# Altium PCB PCB 0901.PcbDoc (part 3 of 3)
Units mm, origin at the board's own origin, x right, y up, seen from the top; angles counter-clockwise.
Board outline 234.06 x 185.93 mm, 2 copper layers (Top Layer, Bottom Layer); 162 components, 256 nets, 1015 pads, 205 vias.
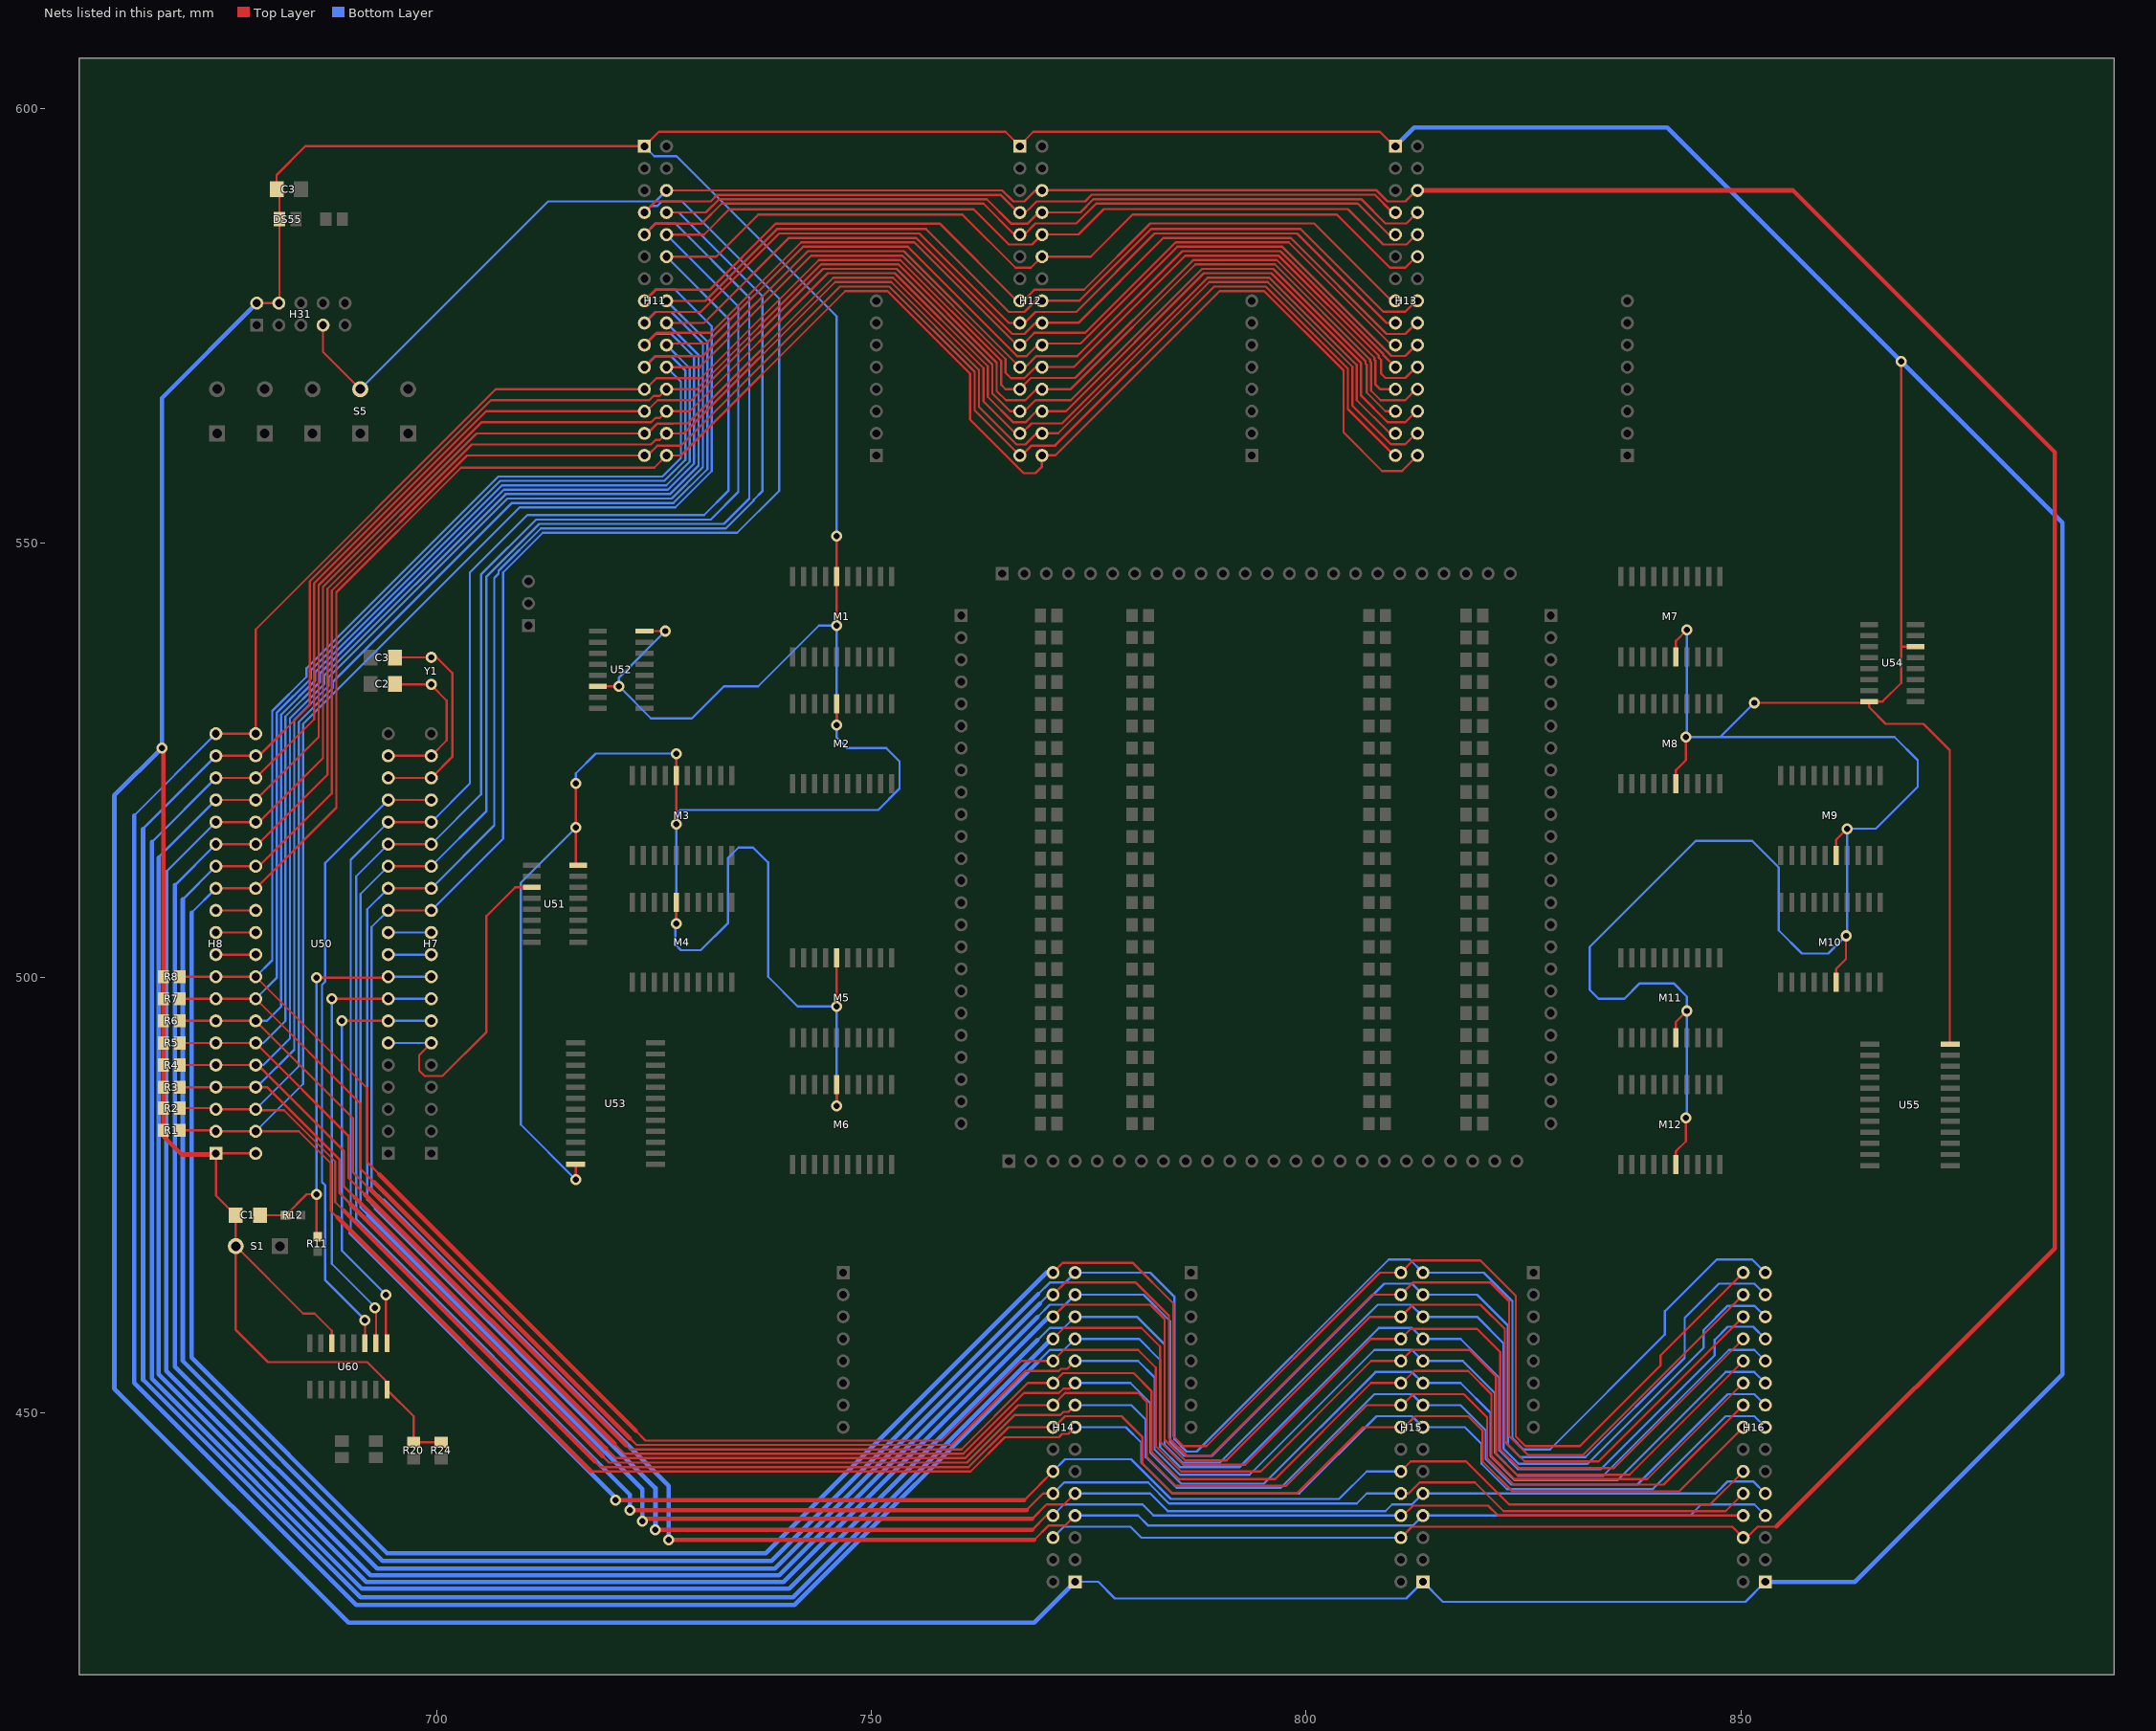
[diagram p3: the nets of this part, all layers, seen from the top]

## Via types
v1: diameter 1.27, hole 0.711, Top Layer to Bottom Layer, 205 vias

## Nets (pads, with @x,y where several pads share a name; then routed paths per layer and width w, separated by ;. In a path a pad name is that pad's centre, name@x,y a point inside that pad or via, vN(x,y) a via of type N, cw(c..) or ccw(c..) an arc to the next point about the centre after c; other vN are vias at no path point) (continued)
P6: H7.6 U50.6 U51.3 | length 38.7
  Top Layer w0.254: H7.6@699.389,492.506 697.992,491.109 697.992,489.331 698.627,488.696 700.659,488.696 705.739,493.776 705.739,507.111 709.041,510.413 U51.3@710.938,510.413
  Bottom Layer w0.254: U50.6@694.436,492.506 H7.6@699.389,492.506
P7: H7.7 U50.7 U60.1 | length 49.5
  Top Layer w0.254: v1(689.102,495.046) U50.7@694.436,495.046 ; v1(694.182,463.55) 694.182,458.097 U60.1@694.309,457.97
  Bottom Layer w0.254: v1(689.102,495.046) 689.102,468.63 v1(694.182,463.55) ; U50.7@694.436,495.046 H7.7@699.389,495.046
P8: H7.8 U50.8 U60.2 | length 53.2
  Top Layer w0.254: v1(687.959,497.586) U50.8@694.436,497.586 ; v1(692.912,462.026) 693.039,461.899 U60.2@693.039,457.97
  Bottom Layer w0.254: v1(687.959,497.586) 687.959,467.106 692.912,462.153 v1(692.912,462.026) ; U50.8@694.436,497.586 H7.8@699.389,497.586
P9: C1.2 H7.9 R11.2 R12.2 U50.9 | length 50.4
  Top Layer w0.254: C1.2@679.704,472.694 R12.2@682.664,472.694 685.077,475.107 v1(686.181,475.107) R11.2@686.181,470.369 ; v1(686.181,499.999) 694.309,499.999 U50.9@694.436,500.126
  Bottom Layer w0.254: v1(686.181,475.107) v1(686.181,499.999) ; U50.9@694.436,500.126 H7.9@699.389,500.126
P10: H7.10 U50.10 | length 5
  Bottom Layer w0.254: U50.10@694.436,502.666 H7.10@699.389,502.666
P11: H7.11 U50.11 | length 5
  Bottom Layer w0.254: U50.11@694.436,505.206 H7.11@699.389,505.206
P12: H7.12 H11.7 H12.7 H13.7 H14.7 H15.7 H16.7 U50.12 | length 432.7
  Top Layer w0.254: U50.12@694.436,507.746 H7.12@699.389,507.746 ; H11.7@723.901,588.01 725.171,589.28 731.52,589.28 732.282,590.042 764.838,590.042 H12.7@766.87,588.01 ; H12.7@767.081,588.01 767.081,587.376 768.997,589.292 774.573,589.292 775.335,590.054 807.891,590.054 809.923,588.022 H13.7@810.134,588.022 ; 768.731,435.356 770.4,437.025 772.293,437.025 H14.7@773.424,438.156
  Top Layer w0.508: v1(726.694,435.356) 768.731,435.356
  Bottom Layer w0.254: 693.928,474.345 692.531,475.742 692.531,505.841 U50.12@694.436,507.746 ; H7.12@699.389,507.746 707.644,516.001 707.644,546.608 712.216,551.18 734.568,551.18 739.394,556.006 739.394,578.104 728.218,589.28 725.889,589.28 725.381,588.772 724.663,588.772 H11.7@723.901,588.01 ; v1@726.694,435.229 v1(726.694,435.356) ; H14.7@773.424,438.156 780.663,438.156 781.794,437.025 812.298,437.025 H15.7@813.429,438.156 844.175,438.156 845.439,439.42 851.535,439.42 H16.7@852.799,438.156
  Bottom Layer w0.508: 693.928,474.345 726.694,441.579 v1@726.694,435.229
P13: H7.13 H11.8 H12.8 H13.8 H14.8 H15.8 H16.8 U50.13 | length 423.8
  Top Layer w0.254: U50.13@694.436,510.286 H7.13@699.389,510.286 ; H11.8@726.441,588.01 730.968,588.01 732.492,589.534 763.27,589.534 766.064,586.74 767.969,586.74 769.239,588.01 H12.8@769.621,588.01 ; 768.477,436.499 770.134,438.156 H14.8@770.884,438.156 H14.8@770.763,438.277 ; H12.8@769.494,588.022 774.021,588.022 775.545,589.546 806.323,589.546 809.117,586.752 811.53,586.752 812.674,587.896 H13.8@812.674,588.022 ; H15.8@810.889,438.156 811.155,438.156 812.292,439.293 820.928,439.293 822.065,438.156 H16.8@850.259,438.156
  Top Layer w0.508: v1(725.17,436.499) 768.477,436.499
  Bottom Layer w0.254: 693.039,473.456 692.023,474.472 692.023,507.873 U50.13@694.436,510.286 ; H7.13@699.389,510.286 706.628,517.525 706.628,545.973 707.136,546.481 707.136,546.818 712.006,551.688 733.254,551.688 736.473,554.907 736.473,554.99 737.489,556.006 737.489,578.358 727.837,588.01 H11.8@726.441,588.01 ; H14.8@770.884,438.156 772.147,439.42 781.177,439.42 782.441,438.156 H15.8@810.889,438.156
  Bottom Layer w0.508: 693.039,473.456 725.17,441.325 v1(725.17,436.499)
P14: H7.14 H11.9 H12.9 H13.9 H14.9 H15.9 H16.9 U50.14 | length 429.5
  Top Layer w0.254: U50.14@694.436,512.826 H7.14@699.389,512.826 ; H11.9@723.901,585.47 725.171,586.74 730.504,586.74 732.79,589.026 762.889,589.026 766.445,585.47 H12.9@767.081,585.47 767.588,585.47 768.87,586.752 773.557,586.752 775.843,589.038 805.942,589.038 809.498,585.482 H13.9@810.134,585.482 ; 768.477,437.769 770.128,439.42 772.147,439.42 H14.9@773.424,440.696
  Top Layer w0.508: v1(723.646,437.515) 723.9,437.769 768.477,437.769
  Bottom Layer w0.254: 692.15,472.694 691.261,473.583 691.261,509.651 U50.14@694.436,512.826 ; H7.14@699.389,512.826 705.739,519.176 705.739,546.14 711.795,552.196 733.044,552.196 735.965,555.117 735.965,578.231 727.456,586.74 725.171,586.74 H11.9@723.901,585.47 ; H14.9@773.424,440.696 773.43,440.69 782.066,440.69 784.092,438.664 809.123,438.664 809.879,439.42 812.152,439.42 H15.9@813.429,440.696 847.096,440.696 848.487,442.087 851.408,442.087 H16.9@852.799,440.696
  Bottom Layer w0.508: 692.15,472.694 723.646,441.198 v1(723.646,437.515)
P15: H7.15 H11.10 H12.10 H13.10 H14.10 H15.10 H16.10 U50.15 | length 423
  Top Layer w0.254: U50.15@694.436,515.366 H7.15@699.389,515.366 ; H11.10@726.441,585.47 730.758,585.47 733.679,588.391 761.746,588.391 765.81,584.327 768.478,584.327 H12.10@769.621,585.47 ; 767.842,438.785 769.753,440.696 H14.10@770.884,440.696 ; H12.10@769.494,585.482 773.811,585.482 776.732,588.403 804.799,588.403 808.863,584.339 811.531,584.339 H13.10@812.674,585.482 ; H15.10@810.889,440.696 811.79,440.696 813.054,441.96 819.404,441.96 822.7,438.664 848.227,438.664 H16.10@850.259,440.696
  Top Layer w0.508: v1(722.249,438.785) 767.842,438.785
  Bottom Layer w0.254: 690.753,472.059 690.753,511.683 U50.15@694.436,515.366 ; H7.15@699.389,515.366 705.104,521.081 705.104,546.354 711.454,552.704 731.52,552.704 734.695,555.879 734.695,577.216 H11.10@726.441,585.47 ; v1@722.249,438.404 v1(722.249,438.785) ; H14.10@770.884,440.696 770.896,440.696 772.16,441.96 781.812,441.96 784.225,439.547 805.815,439.547 806.964,440.696 H15.10@810.889,440.696
  Bottom Layer w0.508: 690.753,472.059 722.249,440.563 v1(722.249,438.785)
P16: H7.16 H11.12 H12.12 H13.12 H14.12 H15.12 H16.12 U50.16 | length 426.9
  Top Layer w0.254: U50.16@694.436,517.906 H7.16@699.389,517.906 H7.16@699.516,517.906 ; H11.12@726.441,582.93 732.155,582.93 736.981,587.756 760.476,587.756 766.572,581.66 768.351,581.66 H12.12@769.621,582.93 ; 767.588,439.928 769.353,441.693 ; 769.353,441.706 H14.12@770.884,443.236 ; H12.12@769.494,582.942 775.208,582.942 780.034,587.768 803.529,587.768 809.625,581.672 811.404,581.672 H13.12@812.674,582.942 ; H15.12@810.889,443.236 812.038,444.386 818.375,444.386 823.341,439.42 846.442,439.42 H16.12@850.259,443.236
  Top Layer w0.508: v1(720.598,439.928) 767.588,439.928
  Bottom Layer w0.254: 690.118,470.662 690.118,513.588 U50.16@694.436,517.906 ; H7.16@699.389,517.906 703.834,522.351 703.834,546.608 710.438,553.212 730.758,553.212 733.552,556.006 733.552,575.819 H11.12@726.441,582.93 ; v1(720.598,439.928) v1@720.598,440.182 ; H14.12@770.884,443.236 772.274,444.627 779.863,444.627 784.435,440.055 803.783,440.055 806.964,443.236 H15.12@810.889,443.236
  Bottom Layer w0.508: 690.118,470.662 v1@720.598,440.182
P17: H7.17 U50.17 U60.3 | length 72.6
  Top Layer w0.254: U60.3@691.769,457.97 v1(691.769,460.629) ; U50.17@694.436,520.446 H7.17@699.389,520.446
  Bottom Layer w0.254: v1(691.769,460.629) 687.197,465.201 687.197,476.123 686.816,476.504 686.816,499.197 687.197,499.578 687.197,513.207 U50.17@694.436,520.446
P18: C3.2@695.201,536.829 H7.18 U50.18 Y1.1 | length 25.3
  Top Layer w0.254: U50.18@694.436,522.986 H7.18@699.389,522.986 701.802,525.399 701.802,535.051 699.998,536.855 Y1.1@699.389,536.855 C3.2@695.227,536.855
P19: C2.1 H7.19 U50.19 Y1.2 | length 18.8
  Top Layer w0.254: U50.19@694.436,525.526 H7.19@699.389,525.526 701.167,527.304 701.167,531.876 699.389,533.654 Y1.2@699.389,533.755 C2.1@695.227,533.755
P21: H8.20 H11.23 H12.23 H13.23 H14.23 H15.23 H16.23 U50.21 | length 515.1
  Top Layer w0.254: H8.20@674.624,528.066 U50.21@679.196,528.066 679.196,540.08 706.806,567.69 H11.23@723.901,567.69 724.027,567.69 725.297,568.96 730.377,568.96 743.966,582.549 753.325,582.549 764.921,570.953 764.921,568.198 765.429,567.69 H12.23@767.081,567.69 ; H12.23@766.954,567.702 767.08,567.702 768.35,568.972 773.43,568.972 787.007,582.549 796.62,582.549 807.847,571.322 807.847,571.092 807.974,570.965 807.974,568.21 808.482,567.702 H13.23@810.134,567.702
  Bottom Layer w0.254: 665.226,518.668 H8.20@674.624,528.066 ; 769.112,455.803 770.509,457.2 772.147,457.2 H14.23@773.424,458.476 780.79,458.476 783.209,456.057 783.209,446.024 785.495,443.738 792.353,443.738 808.355,459.74 812.165,459.74 H15.23@813.429,458.476 817.747,458.476 822.198,454.025 822.198,445.643 824.357,443.484 833.882,443.484 846.963,456.565 846.963,458.343 848.487,459.867 851.408,459.867 H16.23@852.799,458.476
  Bottom Layer w0.508: 665.226,518.668 665.226,453.39 690.753,427.863 741.172,427.863 769.112,455.803
P22: H8.19 H11.24 H12.24 H13.24 H14.24 H15.24 H16.24 U50.22 | length 514.9
  Top Layer w0.254: H8.19@674.624,525.526 U50.22@679.196,525.526 679.577,525.526 685.419,531.368 685.419,545.585 706.254,566.42 724.452,566.42 724.96,566.928 725.679,566.928 H11.24@726.441,567.69 729.869,567.69 744.22,582.041 753.115,582.041 764.413,570.743 764.413,567.48 765.473,566.42 767.715,566.42 768.985,567.69 H12.24@769.621,567.69 ; H12.24@769.494,567.702 772.922,567.702 787.261,582.041 796.41,582.041 807.339,571.112 807.339,570.882 807.466,570.755 807.466,567.519 808.553,566.432 811.404,566.432 H13.24@812.674,567.702 ; H14.24@770.884,458.476 772.147,459.74 781.05,459.74 783.209,457.581 783.209,446.663 785.88,443.992 792.988,443.992 807.472,458.476 H15.24@810.889,458.476 810.901,458.476 812.038,459.613 819.658,459.613 822.325,456.946 822.325,445.77 824.484,443.611 835.393,443.611 H16.24@850.259,458.476
  Bottom Layer w0.254: 666.242,517.144 H8.19@674.624,525.526
  Bottom Layer w0.508: 666.242,517.144 666.242,453.771 691.261,428.752 740.983,428.752 770.708,458.476 H14.24@770.884,458.476
P23: H8.18 H11.25 H12.25 H13.25 H14.25 H15.25 H16.25 U50.23 | length 519.2
  Top Layer w0.254: H8.18@674.624,522.986 U50.23@679.196,522.986 685.927,529.717 685.927,545.374 705.703,565.15 H11.25@723.901,565.15 724.154,565.15 725.423,566.419 729.316,566.419 744.43,581.533 752.904,581.533 763.905,570.532 763.905,567.183 765.938,565.15 H12.25@767.081,565.15 767.588,565.15 768.858,566.42 772.922,566.42 788.035,581.533 796.199,581.533 806.831,570.901 806.831,570.611 806.958,570.484 806.958,567.309 809.117,565.15 H13.25@810.26,565.15
  Bottom Layer w0.254: 667.258,515.62 H8.18@674.624,522.986 ; 769.112,458.343 770.509,459.74 772.147,459.74 H14.25@773.424,461.016 780.536,461.016 783.717,457.835 783.717,446.278 785.749,444.246 790.067,444.246 808.228,462.407 812.038,462.407 H15.25@813.429,461.016 819.652,461.016 822.706,457.962 822.706,445.853 824.44,444.119 832.358,444.119 845.693,457.454 845.693,459.486 848.487,462.28 851.535,462.28 H16.25@852.799,461.016
  Bottom Layer w0.508: 667.258,515.62 667.258,453.898 691.388,429.768 740.537,429.768 769.112,458.343
P24: H8.17 H11.26 H12.26 H13.26 H14.26 H15.26 H16.26 U50.24 | length 518.6
  Top Layer w0.254: H8.17@674.624,520.446 U50.24@679.196,520.446 686.435,527.685 686.435,545.164 705.151,563.88 724.662,563.88 725.17,564.388 725.679,564.388 H11.26@726.441,565.15 729.107,565.15 744.982,581.025 752.694,581.025 763.397,570.322 763.397,566.801 766.318,563.88 767.715,563.88 768.985,565.15 H12.26@769.621,565.15 ; H12.26@769.494,565.162 772.382,565.162 788.245,581.025 795.989,581.025 806.323,570.691 806.323,566.94 809.371,563.892 811.404,563.892 H13.26@812.674,565.162 ; H14.26@770.884,461.016 772.274,462.407 782.066,462.407 783.717,460.756 783.717,446.873 786.09,444.5 790.829,444.5 807.345,461.016 H15.26@810.889,461.016 812.279,462.407 820.039,462.407 822.833,459.613 822.833,446.659 825.119,444.373 833.615,444.373 H16.26@850.259,461.016
  Bottom Layer w0.254: 668.02,513.842 H8.17@674.624,520.446
  Bottom Layer w0.508: 668.02,513.842 668.02,454.406 691.896,430.53 739.902,430.53 770.388,461.016 H14.26@770.884,461.016
P25: H8.16 H11.27 H12.27 H13.27 H14.27 H15.27 H16.27 U50.25 | length 524.2
  Top Layer w0.254: H8.16@674.624,517.906 U50.25@679.196,517.906 679.577,517.906 686.943,525.272 686.943,544.953 704.6,562.61 H11.27@723.901,562.61 724.25,562.61 725.381,563.741 727.19,563.741 727.202,563.753 728.853,563.753 745.617,580.517 752.484,580.517 762.889,570.112 762.889,566.293 766.572,562.61 H12.27@767.081,562.61 ; H12.27@766.954,562.622 767.303,562.622 768.434,563.753 770.243,563.753 770.255,563.765 771.906,563.765 788.658,580.517 795.778,580.517 805.815,570.48 805.815,566.432 809.625,562.622 H13.27@810.134,562.622
  Bottom Layer w0.254: 668.909,512.191 H8.16@674.624,517.906 ; 769.112,461.01 770.509,462.407 772.274,462.407 H14.27@773.424,463.556 781.298,463.556 784.352,460.502 784.352,446.615 785.959,445.008 789.178,445.008 808.99,464.82 812.165,464.82 H15.27@813.429,463.556 819.652,463.556 823.214,459.994 823.214,446.278 824.611,444.881 832.104,444.881 843.534,456.311 843.534,460.883 847.471,464.82 851.535,464.82 H16.27@852.799,463.556
  Bottom Layer w0.508: 668.909,512.191 668.909,454.787 692.404,431.292 739.394,431.292 769.112,461.01
P26: H8.15 H11.28 H12.28 H13.28 H14.28 H15.28 H16.28 U50.26 | length 521.1
  Top Layer w0.254: H8.15@674.624,515.366 U50.26@679.196,515.366 679.45,515.366 687.451,523.367 687.451,544.743 704.048,561.34 724.662,561.34 725.17,561.848 725.679,561.848 H11.28@726.441,562.61 728.428,562.61 745.827,580.009 752.273,580.009 762.381,569.901 762.381,565.658 766.699,561.34 767.715,561.34 768.985,562.61 H12.28@769.621,562.61 ; H12.28@769.494,562.622 771.481,562.622 788.868,580.009 795.568,580.009 805.307,570.27 805.307,565.797 809.752,561.352 811.404,561.352 H13.28@812.674,562.622 ; H14.28@770.884,463.556 772.274,464.947 780.415,464.947 784.225,461.137 784.225,447.084 786.301,445.008 789.051,445.008 807.599,463.556 H15.28@810.889,463.556 812.279,464.947 821.182,464.947 823.341,462.788 823.341,447.294 825.5,445.135 831.837,445.135 H16.28@850.259,463.556
  Bottom Layer w0.254: 669.925,510.667 H8.15@674.624,515.366 ; 769.366,462.534 H14.28@770.388,463.556
  Bottom Layer w0.508: 669.925,510.667 669.925,455.295 693.166,432.054 738.886,432.054 769.366,462.534
P27: H8.14 H11.29 H12.29 H13.29 H14.29 H15.29 H16.29 U50.27 | length 526.9
  Top Layer w0.254: H8.14@674.624,512.826 U50.27@679.196,512.826 679.577,512.826 687.959,521.208 687.959,544.532 703.497,560.07 H11.29@723.901,560.07 724.25,560.07 725.381,561.201 728.079,561.201 746.379,579.501 752.063,579.501 761.873,569.691 761.873,565.278 H12.29@767.069,560.082 ; H12.29@766.954,560.082 H12.29@767.069,560.082 ; H12.29@767.081,560.07 H12.29@767.069,560.082 ; H13.29@810.134,560.082 804.799,565.417 804.799,570.059 795.357,579.501 789.42,579.501 771.132,561.213 768.434,561.213 767.303,560.082 H12.29@767.069,560.082
  Bottom Layer w0.254: 670.814,509.016 H8.14@674.624,512.826 ; 769.175,463.613 770.509,464.947 772.274,464.947 H14.29@773.424,466.096 782.06,466.096 784.86,463.296 784.86,446.913 786.257,445.516 787.4,445.516 809.498,467.614 811.911,467.614 H15.29@813.429,466.096 820.414,466.096 823.722,462.788 823.722,447.04 824.992,445.77 828.04,445.77 841.248,458.978 841.248,461.645 847.217,467.614 851.281,467.614 H16.29@852.799,466.096
  Bottom Layer w0.508: 670.814,509.016 670.814,455.93 693.801,432.943 738.505,432.943 769.175,463.613
P28: H8.13 H11.30 H12.30 H13.30 H14.30 H15.30 H16.30 U50.28 | length 526.4
  Top Layer w0.254: H8.13@674.624,510.286 U50.28@679.196,510.286 688.467,519.557 688.467,544.322 702.818,558.673 725.044,558.673 H11.30@726.441,560.07 728.091,560.07 747.002,578.981 751.864,578.981 761.365,569.48 761.365,564.187 767.514,558.038 768.858,558.038 769.621,558.801 H12.30@769.621,560.07 ; H12.30@769.494,560.082 771.144,560.082 790.043,578.981 795.159,578.981 804.291,569.849 804.291,562.737 808.736,558.292 811.022,558.292 H13.30@812.8,560.07 ; H14.30@770.884,466.096 772.02,467.233 780.034,467.233 784.733,462.534 784.733,447.294 785.876,446.151 788.543,446.151 808.488,466.096 H15.30@810.889,466.096 812.279,467.487 820.039,467.487 824.103,463.423 824.103,447.25 825.202,446.151 831.469,446.151 840.74,455.422 840.74,456.578 H16.30@850.259,466.096
  Bottom Layer w0.254: 671.83,507.492 H8.13@674.624,510.286 ; H14.30@770.134,466.096 H14.30@770.884,466.096
  Bottom Layer w0.508: 671.83,507.492 671.83,456.311 694.309,433.832 737.87,433.832 H14.30@770.134,466.096
P29: H8.12 U50.29 | length 4.6
  Top Layer w0.254: H8.12@674.624,507.746 U50.29@679.196,507.746
P30: H8.11 U50.30 | length 4.6
  Top Layer w0.254: H8.11@674.624,505.206 U50.30@679.196,505.206
P31: H8.10 U50.31 | length 4.6
  Top Layer w0.254: H8.10@674.624,502.666 U50.31@679.196,502.666
P32: H8.9 H11.22 H12.22 H13.22 H14.22 H15.22 H16.22 R8.2 U50.32 | length 458.4
  Top Layer w0.254: R8.2@670.494,500.126 H8.9@674.624,500.126 U50.32@679.196,500.126 692.023,487.299 692.023,478.79 693.42,477.393 ; 722.884,447.929 724.027,446.786 758.063,446.786 767.213,455.936 H14.22@770.884,455.936 772.147,457.2 780.669,457.2 782.701,455.168 782.701,446.151 785.622,443.23 794.766,443.23 807.472,455.936 H15.22@810.889,455.936 810.901,455.936 812.165,457.2 818.769,457.2 821.817,454.152 821.817,445.262 824.23,442.849 837.171,442.849 H16.22@850.259,455.936 ; H11.22@726.441,570.23 730.25,570.23 743.077,583.057 753.536,583.057 765.429,571.164 765.429,569.595 766.064,568.96 767.588,568.96 768.858,570.23 H12.22@769.621,570.23 ; H12.22@769.494,570.242 773.303,570.242 786.118,583.057 796.83,583.057 808.355,571.532 808.355,571.303 808.609,571.049 808.609,569.48 809.117,568.972 811.404,568.972 H13.22@812.674,570.242
  Top Layer w0.508: 693.42,477.393 722.884,447.929
  Bottom Layer w0.254: U50.32@679.196,500.126 681.101,502.031 681.101,530.682 685.038,534.619 685.038,535.595 707.1,557.657 725.983,557.657 728.091,559.765 728.091,568.58 H11.22@726.441,570.23
P33: H8.8 H11.21 H12.21 H13.21 H14.21 H15.21 H16.21 R7.2 U50.33 | length 463.3
  Top Layer w0.254: R7.2@670.494,497.586 H8.8@674.624,497.586 U50.33@679.196,497.586 691.261,485.521 691.261,478.028 692.912,476.377 ; 722.122,447.167 723.011,446.278 759.206,446.278 767.715,454.787 771.556,454.787 771.81,455.041 772.528,455.041 H14.21@773.424,455.936 ; H11.21@723.901,570.23 725.171,571.5 730.631,571.5 742.696,583.565 753.746,583.565 H12.21@767.081,570.23 767.715,570.23 768.985,571.5 773.684,571.5 785.749,583.565 797.041,583.565 808.863,571.743 808.863,571.627 H13.21@810.26,570.23
  Top Layer w0.508: 692.785,476.504 722.249,447.04
  Bottom Layer w0.254: U50.33@679.196,497.586 681.609,499.999 681.609,530.472 685.546,534.409 685.546,535.385 707.31,557.149 726.193,557.149 728.599,559.555 728.599,569.849 726.948,571.5 725.171,571.5 H11.21@723.901,570.23 ; H14.21@773.424,455.936 780.675,455.936 782.574,454.038 782.574,445.77 785.495,442.849 793.496,442.849 807.847,457.2 812.165,457.2 H15.21@813.429,455.936 818.013,455.936 821.69,452.26 821.69,445.389 824.351,442.728 834.142,442.728 848.614,457.2 851.535,457.2 H16.21@852.799,455.936
P34: H8.7 H11.20 H12.20 H13.20 H14.20 H15.20 H16.20 R6.2 U50.34 | length 454.2
  Top Layer w0.254: R6.2@670.494,495.046 H8.7@674.624,495.046 U50.34@679.196,495.046 690.372,483.87 690.372,477.647 692.277,475.742 ; 721.741,446.278 722.249,445.77 760.356,445.77 767.983,453.396 H14.20@770.884,453.396 772.02,454.533 780.161,454.533 782.193,452.501 782.193,445.516 785.368,442.341 796.417,442.341 807.472,453.396 H15.20@810.889,453.396 811.028,453.396 812.419,454.787 818.642,454.787 821.309,452.12 821.309,445.008 823.976,442.341 839.203,442.341 H16.20@850.259,453.396 ; H11.20@726.441,572.77 726.613,572.942 731.013,572.942 742.144,584.073 754.198,584.073 765.95,572.321 765.95,572.302 766.752,571.5 767.842,571.5 769.112,572.77 H12.20@769.621,572.77 ; H12.20@769.494,572.782 769.666,572.954 774.066,572.954 785.185,584.073 797.263,584.073 809.371,571.965 809.371,571.946 809.805,571.512 811.404,571.512 H13.20@812.674,572.782
  Top Layer w0.508: 692.277,475.742 721.741,446.278
  Bottom Layer w0.254: U50.34@679.196,495.046 680.466,495.046 682.117,496.697 682.117,530.261 686.054,534.198 686.054,535.174 707.521,556.641 726.404,556.641 729.107,559.344 729.107,570.104 H11.20@726.441,572.77
P35: H8.6 H11.19 H12.19 H13.19 H14.19 H15.19 H16.19 R5.2 U50.35 | length 460.1
  Top Layer w0.254: R5.2@670.494,492.506 H8.6@674.624,492.506 U50.35@679.196,492.506 689.864,481.838 689.864,477.012 691.705,475.171 ; 720.471,446.405 721.614,445.262 760.567,445.262 767.552,452.247 771.569,452.247 772.077,452.755 772.782,452.755 H14.19@773.424,453.396 ; H11.19@723.901,572.77 725.298,574.167 731.52,574.167 741.934,584.581 754.932,584.581 766.773,572.74 H12.19@767.081,573.048 ; H12.19@766.954,572.782 767.346,572.782 768.743,574.179 774.573,574.179 784.975,584.581 797.997,584.581 809.826,572.752 H13.19@810.134,573.06
  Top Layer w0.508: 691.769,475.107 720.471,446.405
  Bottom Layer w0.254: U50.35@679.196,492.506 680.085,492.506 682.625,495.046 682.625,530.051 686.562,533.988 686.562,534.964 707.731,556.133 726.614,556.133 729.615,559.134 729.615,571.418 726.993,574.04 725.171,574.04 H11.19@723.901,572.77 ; H14.19@773.424,453.396 779.774,453.396 782.066,451.104 782.066,445.389 785.622,441.833 795.147,441.833 807.974,454.66 812.165,454.66 H15.19@813.429,453.396 817.747,453.396 821.182,449.961 821.182,445.008 823.97,442.22 835.793,442.22 848.233,454.66 851.535,454.66 H16.19@852.799,453.396
P36: H8.5 H11.18 H12.18 H13.18 H14.18 H15.18 H16.18 R4.2 U50.36 | length 452.1
  Top Layer w0.254: R4.2@670.494,489.966 H8.5@674.624,489.966 U50.36@679.196,489.966 679.45,489.966 689.356,480.06 689.356,475.996 691.007,474.345 ; 719.455,445.897 720.598,444.754 760.777,444.754 766.88,450.856 H14.18@770.884,450.856 770.896,450.856 772.287,452.247 780.669,452.247 781.685,451.231 781.685,444.881 784.987,441.579 797.687,441.579 806.964,450.856 H15.18@810.889,450.856 811.028,450.856 812.292,452.12 818.134,452.12 820.801,449.453 820.801,444.754 823.849,441.706 841.108,441.706 H16.18@850.259,450.856 ; H11.18@726.441,575.31 730.758,575.31 740.537,585.089 755.142,585.089 766.191,574.04 767.588,574.04 768.858,575.31 H12.18@769.621,575.31 ; H12.18@769.494,575.322 773.811,575.322 783.578,585.089 798.207,585.089 809.244,574.052 811.404,574.052 H13.18@812.674,575.322
  Top Layer w0.508: 690.626,474.726 719.455,445.897
  Bottom Layer w0.254: U50.36@679.196,489.966 680.085,489.966 683.133,493.014 683.133,529.84 687.07,533.777 687.07,534.753 707.942,555.625 726.825,555.625 730.123,558.923 730.123,571.628 H11.18@726.441,575.31
P37: H8.4 H11.17 H12.17 H13.17 H14.17 H15.17 H16.17 R3.2 U50.37 | length 458.1
  Top Layer w0.254: R3.2@670.494,487.426 H8.4@674.624,487.426 U50.37@679.196,487.426 680.506,487.426 688.848,479.084 688.848,475.234 690.626,473.456 ; 719.074,445.008 719.836,444.246 760.988,444.246 766.449,449.707 771.696,449.707 772.077,450.088 772.655,450.088 H14.17@773.424,450.856 ; H11.17@723.901,575.31 725.171,576.58 730.377,576.58 739.394,585.597 755.523,585.597 765.81,575.31 H12.17@767.081,575.31 767.588,575.31 768.858,576.58 773.557,576.58 782.574,585.597 798.957,585.597 809.244,575.31 H13.17@810.26,575.31
  Top Layer w0.508: 690.118,473.964 719.074,445.008
  Bottom Layer w0.254: U50.37@679.196,487.426 679.323,487.426 683.641,491.744 683.641,529.63 687.578,533.567 687.578,534.543 708.152,555.117 727.035,555.117 730.631,558.713 730.631,572.942 726.993,576.58 725.171,576.58 H11.17@723.901,575.31 ; H14.17@773.424,450.856 779.901,450.856 781.558,449.199 781.558,444.881 785.114,441.325 797.052,441.325 807.847,452.12 812.165,452.12 H15.17@813.429,450.856 817.747,450.856 820.674,447.929 820.674,444.627 823.589,441.712 838.079,441.712 848.487,452.12 851.535,452.12 H16.17@852.799,450.856
P38: H8.3 H11.16 H12.16 H13.16 H14.16 H15.16 H16.16 R2.2 U50.38 | length 449.7
  Top Layer w0.254: R2.2@670.494,485.013 H8.3@674.497,485.013 ; H8.3@674.624,484.886 U50.38@679.196,484.886 679.323,484.759 682.454,484.759 688.34,478.873 688.34,474.218 689.737,472.821 ; 718.185,444.373 718.82,443.738 761.198,443.738 765.777,448.316 H14.16@770.884,448.316 771.023,448.316 772.287,449.58 778.764,449.58 781.177,447.167 781.177,444.119 784.606,440.69 798.917,440.69 806.544,448.316 H15.16@810.889,448.316 811.282,448.316 812.549,449.583 818.639,449.583 820.293,447.929 820.293,444.373 823.722,440.944 842.886,440.944 H16.16@850.259,448.316 ; H11.16@726.441,577.85 730.885,577.85 739.14,586.105 756.285,586.105 765.81,576.58 767.588,576.58 768.858,577.85 H12.16@769.621,577.85 ; H12.16@769.494,577.862 773.938,577.862 782.193,586.117 799.338,586.117 808.863,576.592 811.404,576.592 H13.16@812.674,577.862
  Top Layer w0.508: 689.356,473.202 718.185,444.373
  Bottom Layer w0.254: U50.38@679.196,484.886 684.149,489.839 684.149,529.419 688.086,533.356 688.086,534.035 708.66,554.609 727.246,554.609 731.139,558.502 731.139,573.152 H11.16@726.441,577.85
P39: H8.2 H11.15 H12.15 H13.15 H14.15 H15.15 H16.15 R1.2 U50.39 | length 456.8
  Top Layer w0.254: R1.2@670.494,482.473 H8.2@674.497,482.473 ; H8.2@674.624,482.346 U50.39@679.196,482.346 684.149,482.346 687.832,478.663 687.832,473.202 688.848,472.186 ; 717.74,443.23 761.409,443.23 765.346,447.167 771.569,447.167 771.95,447.548 772.655,447.548 H14.15@773.424,448.316 ; H11.15@723.901,577.85 725.171,579.12 731.393,579.12 739.013,586.74 757.853,586.74 766.743,577.85 767.461,577.85 768.743,579.132 774.446,579.132 782.066,586.752 800.906,586.752 809.796,577.862 H13.15@810.134,577.862
  Top Layer w0.508: 688.594,472.44 717.74,443.293
  Bottom Layer w0.254: U50.39@679.196,482.346 684.657,487.807 684.657,529.209 709.549,554.101 727.456,554.101 731.647,558.292 731.647,574.929 727.456,579.12 725.171,579.12 H11.15@723.901,577.85 ; H14.15@773.424,448.316 779.266,448.316 781.05,446.532 781.05,444.246 784.606,440.69 799.211,440.69 808.101,449.58 812.165,449.58 H15.15@813.429,448.316 818.255,448.316 820.166,446.405 820.166,444.119 823.081,441.204 839.857,441.204 848.233,449.58 851.535,449.58 H16.15@852.799,448.316
RAGE: H11.6 H12.6 H13.6 H14.6 H15.6 H16.6 H31.7 S5.2 | length 450.7
  Top Layer w0.254: H31.7@686.943,575.056 686.943,571.976 S5.2@691.229,567.69 ; H11.6@726.441,590.55 765.048,590.55 766.318,589.28 767.588,589.28 768.858,590.55 H12.6@769.621,590.55 ; H12.6@769.494,590.562 808.101,590.562 809.371,589.292 811.404,589.292 H13.6@812.674,590.562 ; H15.6@810.889,435.616 810.901,435.616 812.165,436.88 848.995,436.88 H16.6@850.259,435.616 850.652,435.616 851.916,436.88 854.075,436.88
  Top Layer w0.508: H13.6@812.8,590.55 855.98,590.55 886.079,560.451 886.079,468.884 854.075,436.88
  Bottom Layer w0.254: S5.2@691.229,567.69 712.819,589.28 725.171,589.28 H11.6@726.441,590.55 ; H14.6@770.884,435.616 772.147,436.88 779.78,436.88 781.044,435.616 H15.6@810.889,435.616
VCC: C1.1 C3.2@681.606,590.677 DS55.1 H8.1 H11.1 H12.1 H13.1 H14.1 H15.1 H16.1 H31.2 H31.4 M1.16 M2.16 M3.16 M4.16 M5.16 M6.16 M7.16 M8.16 M9.16 M10.16 M11.16 M12.16 R1.1 R2.1 R3.1 R4.1 R5.1 R6.1 R7.1 R8.1 R20.2 R24.2 S1.2 U50.40 U51.16 U52.6 U52.16 U53.24 U54.6 U54.16 U55.24 U60.6 U60.16 | length 1454.1
  Top Layer w0.254: v1(668.401,526.415) v1@668.594,526.222 ; S1.2@676.904,469.144 C1.1@676.904,472.694 674.624,474.974 674.624,479.679 H8.1@674.624,479.806 U50.40@679.196,479.806 ; H31.2@679.323,577.596 H31.4@681.863,577.596 681.929,577.662 DS55.1@681.929,587.248 681.929,590.354 C3.2@681.606,590.677 681.606,592.325 684.911,595.63 H11.1@723.901,595.63 725.552,597.281 765.43,597.281 H12.1@767.012,595.699 ; U60.6@687.959,457.97 687.959,459.403 685.971,461.391 684.657,461.391 S1.2@676.91,469.138 676.91,459.486 680.593,455.803 692.023,455.803 694.309,453.517 U60.16@694.309,452.62 697.357,449.572 R20.2@697.357,446.593 R24.2@700.532,446.593 ; v1(715.998,476.786) U53.24@715.998,478.536 ; v1(716.026,522.351) v1(716.026,517.271) 716.026,513.215 U51.16@716.288,512.953 ; U52.6@718.558,533.527 v1(720.979,533.527) ; U52.16@723.908,539.877 v1(726.313,539.877) ; v1@727.583,506.095 v1(727.583,506.222) M4.16@727.583,508.663 ; v1(727.583,517.652) M3.16@727.583,523.268 v1(727.583,525.78) ; v1@745.998,485.14 v1(745.998,485.267) M6.16@745.998,487.708 ; v1(745.998,496.697) M5.16@745.998,502.313 ; v1@745.998,528.955 v1(745.998,529.082) M2.16@745.998,531.523 ; v1(745.998,540.512) M1.16@745.998,546.128 v1(745.998,550.799) ; H12.1@766.954,595.642 H12.1@767.012,595.699 ; H12.1@767.081,595.63 H12.1@767.012,595.699 ; H13.1@810.134,595.642 808.483,597.293 768.605,597.293 H12.1@767.012,595.699 ; M12.16@842.518,478.508 842.518,480.06 843.661,481.203 v1(843.661,483.87) ; M11.16@842.518,493.113 842.518,494.919 v1(843.788,496.189) ; M8.16@842.518,522.323 842.518,523.875 843.661,525.018 v1(843.661,527.685) ; M7.16@842.518,536.928 842.518,538.734 v1(843.788,540.004) ; v1(851.535,531.622) U54.16@864.608,531.622 ; M10.16@860.933,499.463 860.933,501.015 862.076,502.158 v1(862.076,504.825) ; M9.16@860.933,514.068 860.933,515.874 v1(862.203,517.144) ; v1(868.426,570.865) 868.426,538.099 ; U54.6@870.085,538.099 868.426,538.099 ; U55.24@874.01,492.379 874.01,526.165 870.97,529.205 866.652,529.205 864.735,531.122 U54.16@864.735,531.749 866.267,531.749 868.426,533.908 868.426,538.099
  Top Layer w0.508: v1@668.594,526.222 R8.1@668.594,500.126 R7.1@668.594,497.586 R6.1@668.594,495.046 R5.1@668.594,492.506 R4.1@668.594,489.966 R3.1@668.594,487.426 R2.1@668.594,485.013 R1.1@668.594,482.473 668.594,481.772 670.687,479.679 H8.1@674.624,479.679
  Bottom Layer w0.254: v1(715.998,476.786) 709.676,483.108 709.676,510.921 v1(716.026,517.271) ; v1(716.026,522.351) 716.026,523.494 718.312,525.78 v1(727.583,525.78) ; H11.1@723.901,595.63 725.044,594.487 727.583,594.487 745.998,576.072 v1(745.998,550.799) ; v1(726.313,539.877) 720.979,534.543 v1(720.979,533.527) 724.662,529.844 729.361,529.844 733.044,533.527 736.981,533.527 743.966,540.512 v1(745.998,540.512) v1(745.998,529.082) 745.998,527.645 747.228,526.415 751.709,526.415 753.237,524.887 753.237,521.76 750.78,519.303 728.047,519.303 727.71,518.966 727.71,517.779 v1(727.583,517.652) v1(727.583,506.222) ; v1@727.456,506.095 727.456,503.809 728.091,503.174 730.377,503.174 733.524,506.321 733.524,513.795 734.714,514.985 736.398,514.985 738.124,513.259 738.124,500.126 741.553,496.697 v1(745.998,496.697) v1(745.998,485.267) ; H14.1@773.424,430.536 776.091,430.536 778.002,428.625 811.517,428.625 H15.1@813.429,430.536 815.721,428.244 850.506,428.244 H16.1@852.799,430.536 ; H13.1@810.26,595.63 H13.1@810.768,595.63 ; v1(843.661,527.685) v1@843.788,527.685 ; v1@843.788,483.743 v1(843.788,496.189) 843.788,497.84 842.264,499.364 838.367,499.364 836.589,497.586 833.624,497.586 832.612,498.598 832.612,503.555 844.804,515.747 851.277,515.747 854.329,512.695 854.329,505.46 856.996,502.793 860.044,502.793 v1(862.076,504.825) ; v1(843.788,540.004) v1@843.788,527.685 ; v1(851.535,531.622) 847.598,527.685 ; v1@862.203,504.698 v1(862.203,517.144) 865.505,517.144 870.331,521.97 870.331,525.018 867.664,527.685 847.598,527.685 ; v1@843.788,527.685 847.598,527.685
  Bottom Layer w0.508: H31.2@679.323,577.596 668.401,566.674 v1(668.401,526.415) 662.94,520.954 662.94,452.755 689.864,425.831 768.718,425.831 H14.1@773.424,430.536 ; H13.1@810.26,595.63 812.419,597.789 841.502,597.789 v1(868.426,570.865) 886.968,552.323 886.968,454.406 863.092,430.53 ; H16.1@852.799,430.536 863.086,430.536
pads on no net: H11.13 H12.13 H13.13 H14.13 H15.13 H16.13 M1.15 M2.15 M3.15 M4.15 M5.15 M6.15 M7.15 M8.15 M9.15 M10.15 M11.15 M12.15 U51.9 U51.10 U51.11 U51.12 U51.13 U51.14 U51.15

## Polygon pours and split planes (outlines as drawn)
GND on Top Layer "Top Layer-No Net" (solid, remove dead copper, pour order 16): 658.876,419.862 658.876,605.79 892.937,605.79 892.937,419.862
GND on Bottom Layer "BOTTOM Layer-No Net1" (solid, remove dead copper, pour order 18): 658.876,419.862 658.876,605.79 892.937,605.79 892.937,419.862

## Silkscreen, mask and mechanical layers (free items; w line width, h text height)
Top Overlay:
  lines w0.254: 721.996,598.17 721.996,557.53 752.475,557.53 752.475,598.162 ; 722.002,598.164 752.477,598.164 ; 744.849,468.636 744.849,427.996 775.328,427.996 775.328,468.628 ; 744.855,468.63 775.33,468.63 ; 765.176,598.17 765.176,557.53 795.655,557.53 795.655,598.162 ; 765.182,598.164 795.657,598.164 ; 784.854,468.636 784.854,427.996 815.333,427.996 815.333,468.628 ; 784.86,468.63 815.335,468.63 ; 808.355,598.17 808.355,557.53 838.834,557.53 838.834,598.162 ; 808.361,598.164 838.836,598.164 ; 824.224,468.636 824.224,427.996 854.703,427.996 854.703,468.628 ; 824.23,468.63 854.705,468.63
Mechanical 1:
  circle w0.3: c665.528,599.694 r1.75
  circle w0.3: c885.873,599.694 r1.75
  circle w0.3: c665.528,426.466 r1.75
  circle w0.3: c885.873,426.466 r1.75
  lines w0.254: 658.876,419.862 892.937,419.862 892.937,605.79 658.876,605.79 658.876,419.862

## Text inside footprints (layer, text, board x,y; h text height)
H11: Top Overlay "30" at 725.933,556.514 h1.27 r270; Top Overlay "29" at 723.393,556.641 h1.27 r270; Top Overlay "2" at 725.933,599.948 h1.27 r270; Top Overlay "1" at 723.393,599.694 h1.27 r270
H12: Top Overlay "30" at 769.113,556.641 h1.27 r270; Top Overlay "29" at 766.573,556.641 h1.27 r270; Top Overlay "2" at 769.113,600.075 h1.27 r270; Top Overlay "1" at 766.573,599.821 h1.27 r270
H13: Top Overlay "30" at 812.292,556.641 h1.27 r270; Top Overlay "29" at 809.752,556.641 h1.27 r270; Top Overlay "2" at 812.292,599.948 h1.27 r270; Top Overlay "1" at 809.752,599.694 h1.27 r270
H14: Top Overlay "30" at 771.392,469.525 h1.27 r90; Top Overlay "29" at 773.932,469.525 h1.27 r90; Top Overlay "2" at 771.392,425.964 h1.27 r90; Top Overlay "1" at 773.932,426.091 h1.27 r90
H15: Top Overlay "30" at 811.524,469.398 h1.27 r90; Top Overlay "29" at 813.937,469.525 h1.27 r90; Top Overlay "2" at 811.397,426.345 h1.27 r90; Top Overlay "1" at 813.937,426.599 h1.27 r90
H16: Top Overlay "30" at 850.767,469.398 h1.27 r90; Top Overlay "29" at 853.307,469.525 h1.27 r90; Top Overlay "2" at 850.767,426.218 h1.27 r90; Top Overlay "1" at 853.307,426.345 h1.27 r90
H31: Top Overlay "2" at 676.656,577.088 h1.27; Top Overlay "1" at 677.037,574.167 h1.27; Top Overlay "9" at 691.388,574.421 h1.27; Top Overlay "10" at 691.388,577.088 h1.27